# EAGLE board cyrf6936-bob (EAGLE 6.4)
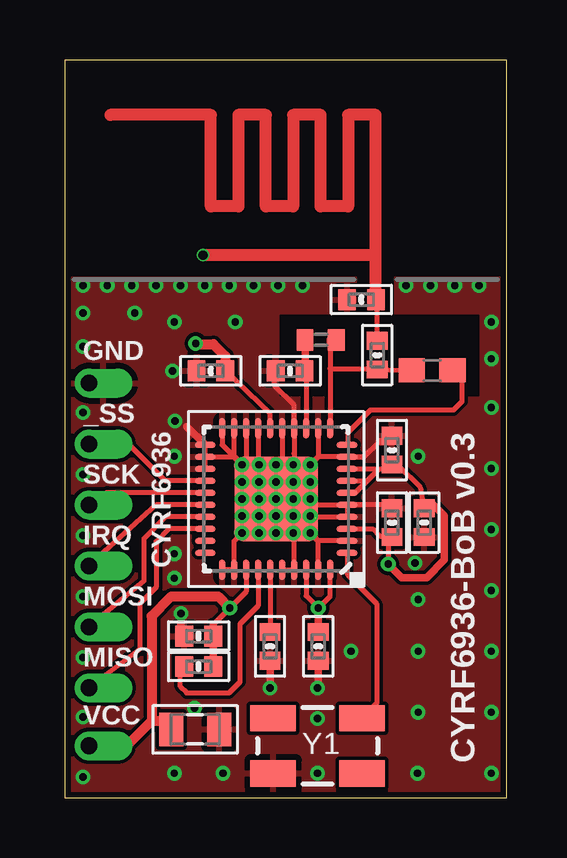
[diagram p0: board, top side]
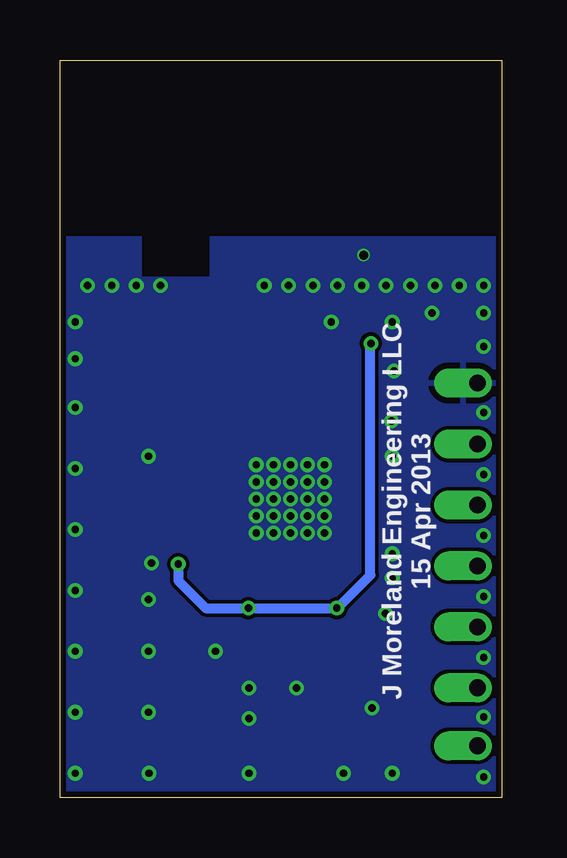
[diagram p1: board, bottom side, seen from below]

Size 18.41 x 30.73 mm. Coordinates in mm from the lower left corner, seen from the top.
Outline: 0,0 18.41,0 18.41,30.73 0,30.73 0,0
Copper layers (1*16): Top 0.035mm / dielectric 1.5mm / Bottom 0.035mm
Design rules "Fusion_eagle_rule_v1.1-JCM-restring *": minimum track width 6mil, minimum drill 12mil, track to track 6mil, track to pad 6mil, pad to pad 6mil, via to via 6mil, smd to smd 0mil, copper to edge 10mil, drill to drill 10mil, minimum pad ring 10mil, minimum via ring 2mil, stop-mask expansion 2mil, vias tented up to drill 100mil, thermal gap 10mil
Net classes: 0 default: width 0.203 mm, drill 0.305 mm
tRestrict: area 9,16.7 to 17.3,20.1; area 12.2,20.1 to 13.7,21.8
bRestrict: area 12.2,21.7 to 15,23.4

## Footprints (pad centres in the part's own frame; a part is rotated, then mirrored left to right if it is on the bottom)
1X1_50MIL = drill 0.7 pad 1.016 offset: P$1 0,0
0402-CAP = smd 0.74 x 0.87: 1 -0.6,0; 2 0.6,0
0805 = smd 1 x 1.4: 1 -1,0; 2 1,0
QFN50P600X600X90-41N = smd 0.25 x 0.86: 1 -2.25,-2.95; 2 -1.75,-2.95; 3 -1.25,-2.95; 4 -0.75,-2.95; 5 -0.25,-2.95; 6 0.25,-2.95; 7 0.75,-2.95; 8 1.25,-2.95; 9 1.75,-2.95; 10 2.25,-2.95; 21 2.25,2.95; 22 1.75,2.95; 23 1.25,2.95; 24 0.75,2.95; 25 0.25,2.95; 26 -0.25,2.95; 27 -0.75,2.95; 28 -1.25,2.95; 29 -1.75,2.95; 30 -2.25,2.95 | smd 0.86 x 0.25: 11 2.95,-2.25; 12 2.95,-1.75; 13 2.95,-1.25; 14 2.95,-0.75; 15 2.95,-0.25; 16 2.95,0.25; 17 2.95,0.75; 18 2.95,1.25; 19 2.95,1.75; 20 2.95,2.25; 31 -2.95,2.25; 32 -2.95,1.75; 33 -2.95,1.25; 34 -2.95,0.75; 35 -2.95,0.25; 36 -2.95,-0.25; 37 -2.95,-0.75; 38 -2.95,-1.25; 39 -2.95,-1.75; 40 -2.95,-2.25 | smd 3.5 x 3.5: 41 0,0
0603 = smd 1.1 x 1: 1 -0.85,0; 2 0.85,0
C0402 = smd 0.7 x 0.9: 1 -0.65,0; 2 0.65,0
CRYSTAL-SMD-5X3 = smd 1.9 x 1.1: 1 -1.85,-1.15; 2 1.85,-1.15; 3 1.85,1.15; 4 -1.85,1.15

## Placement (x,y rotation side)
_SS  SOLDER_PADTH  [1X1_50MIL]  1.02,14.73 0 top
C1  15pF  [0402-CAP]  13.03,18.44 90 top
C3  2.0pF  [0402-CAP]  9.4,17.78 180 top
C4  1.5pF  [0402-CAP]  12.37,20.75 180 top
C5  0.47uF  [0402-CAP]  8.56,6.3 270 top
C6  0.047uF  [0402-CAP]  6.1,17.78 180 top
C7  0.047uF  [0402-CAP]  13.64,11.46 90 top
C8  0.047uF  [0402-CAP]  5.59,6.73 180 top
C9  0.047uF  [0402-CAP]  10.57,6.3 270 top
C10  0.047uF  [0402-CAP]  14.99,11.46 270 top
C11  0.047uF  [0402-CAP]  13.64,14.48 90 top
C14  2.2uF  [0805]  5.44,2.84 0 top
C15  0.47uF  [0402-CAP]  5.59,5.46 180 top
CYRF6936  CYRF6936QFN  [QFN50P600X600X90-41N]  8.81,12.45 90 top
GND  SOLDER_PADTH  [1X1_50MIL]  1.02,17.27 0 top
IRQ  SOLDER_PADTH  [1X1_50MIL]  1.02,9.65 0 top
L1  [0603]  15.32,17.81 180 top
L2  [C0402]  10.67,19.08 0 top
MISO  SOLDER_PADTH  [1X1_50MIL]  1.02,4.57 0 top
MOSI  SOLDER_PADTH  [1X1_50MIL]  1.02,7.11 0 top
SCK  SOLDER_PADTH  [1X1_50MIL]  1.02,12.19 0 top
VCC  SOLDER_PADTH  [1X1_50MIL]  1.02,2.16 0 top
Y1  [CRYSTAL-SMD-5X3]  10.54,2.16 0 top

## Library data of the parts
_SS GND IRQ MISO MOSI SCK VCC = JCM-Connectors
C1 = JCM-Capacitors; PARTNO: C0402C150J5GACTU; VOLT: 50
C3 = JCM-Capacitors; PARTNO: C0402C209C5GACTU; VOLT: 50
C4 = JCM-Capacitors; PARTNO: C0402C159B5GACTU; VOLT: 50
C5 C15 = JCM-Capacitors; PARTNO: GRM155R60J474KE19D; VOLT: 6.3
C6-C11 = JCM-Capacitors; PARTNO: 0402YD473KAT2A
C14 = JCM-Capacitors; PARTNO: GRM21BR71A225KA01L
CYRF6936 = JCM-IC; PARTNO: CYRF6936B-40LTXC
L1 = SparkFun-Passives; PARTNO: ELJ-RE22NGFA
L2 = SparkFun-Passives; PARTNO: ELJ-RF1N8DFB
Y1 = SparkFun-FreqCtrl; PARTNO: 7B-12.000MEEQ-T

## Nets
_SS: _SS.P$1 CYRF6936.24
GND: C1.2 C3.2 C4.1 C4.2 C5.2 C6.2 C7.2 C8.2 C9.2 C10.2 C11.2 C14.2 CYRF6936.2 CYRF6936.4 CYRF6936.5 CYRF6936.9 CYRF6936.12 CYRF6936.14 CYRF6936.15 CYRF6936.17 CYRF6936.18 CYRF6936.19 CYRF6936.20 CYRF6936.21 CYRF6936.22 CYRF6936.23 CYRF6936.31 CYRF6936.32 CYRF6936.36 CYRF6936.37 CYRF6936.39 CYRF6936.41 GND.P$1 Y1.1
IRQ: CYRF6936.26 IRQ.P$1
MISO: CYRF6936.28 MISO.P$1
MOSI: CYRF6936.27 MOSI.P$1
N$2: CYRF6936.1 Y1.3
PACTL: CYRF6936.30
RFBIAS: CYRF6936.10 L1.1
RFN: C3.1 CYRF6936.13 L2.1
RFP: C1.1 CYRF6936.11 L1.2 L2.2
RST: C15.2 CYRF6936.34
SCK: CYRF6936.25 SCK.P$1
TV1: CYRF6936.29
VCC: C6.1 C7.1 C8.1 C9.1 C10.1 C11.1 C14.1 C15.1 CYRF6936.3 CYRF6936.6 CYRF6936.7 CYRF6936.8 CYRF6936.16 CYRF6936.33 CYRF6936.38 CYRF6936.40 VCC.P$1
VDD: C5.1 CYRF6936.35

## Tracks (layer width: path | path; a pad name or v marks a point on that pad's centre or on a via)
_SS
  Top 0.203: CYRF6936.24 4.2,13.2 2.67,14.73 _SS.P$1
GND  (via drill 0.3 pad 0.61, 0.38 pad 0.51)  (1 unrouted)
  Top 0.203: 11.79,12.19 10.52,12.19 | 13.64,12.2 CYRF6936.5 11.79,12.2 11.79,11.68 | CYRF6936.2 10.57,10.7 | CYRF6936.18 7.56,13.97 v7.39,13.87 7.06,14.2 | CYRF6936.20 6.56,14.7 7.06,14.2 | CYRF6936.22 CYRF6936.21 | 8.74,17.77 8.74,17.17 9.56,16.34 CYRF6936.14 9.56,14.34 v9.52,13.87 | 13.11,14.83 12.47,14.2 CYRF6936.9 10.57,14.2 v10.24,13.87 10.56,14.2 CYRF6936.12 | CYRF6936.36 CYRF6936.37 9.56,10.55 v9.52,11.02 | 13.02,19.09 13.02,20.7 C4.1 12.95,20.77 12.95,21.21 | 5.84,14.2 7.06,14.2 | 7.06,14.2 CYRF6936.19 | CYRF6936.15 9.06,13.97 v8.81,13.87 | CYRF6936.4 10.24,11.68 v10.24,11.73 | 10.57,9.47 10.57,10.69 v10.24,11.02 | CYRF6936.31 CYRF6936.32 7.06,10.7 v7.39,11.02 | CYRF6936.23 5.86,14.17 5.84,14.17 | CYRF6936.17 8.06,13.97 v8.1,13.87
  Top 0.254: 11.8,12.21 CYRF6936.5 11.79,12.19 | 10.44,11.66 10.44,12.45 CYRF6936.41 | C7.2 13.64,12.2 | 10.57,10.7 v10.24,11.02 | CYRF6936.39 10.57,9.47 | 7.06,14.2 v7.39,13.87 | 10.57,4.57 v10.54,4.57 | 8.56,4.72 v8.56,4.57 | 10.44,10.85 10.44,11.63
  Top 0.305: CYRF6936.21 5.09,15.44 | C9.2 10.57,4.57 | C5.2 8.56,4.72 | v4.85,7.67 4.84,6.96 C8.2 | 8.74,17.77 C3.2 | C1.2 13.02,19.09 | 13.11,14.83 13.63,14.83 C11.2
  Top 0.508: 12.95,21.21 12.95,22.61 | 12.95,22.61 12.95,28.45 11.81,28.45 11.81,24.64 10.67,24.64 10.67,28.45 9.52,28.45 9.52,24.64 8.38,24.64 8.38,28.45 7.24,28.45 7.24,24.64 6.1,24.64 6.1,28.45 1.9,28.45 | 12.95,22.61 v5.77,22.61
  other vias: 4.57,9.14 14.61,9.78 10.24,13.16 9.52,13.16 8.81,13.16 8.1,13.16 7.39,13.16 10.24,12.45 9.52,12.45 8.81,12.45 8.1,12.45 7.39,12.45 9.52,11.73 8.81,11.73 8.1,11.73 7.39,11.73 8.81,11.02 8.1,11.02 4.5,17.78 4.6,15.7 0.76,3.35 0.76,5.84 0.76,8.38 0.76,10.92 0.76,13.46 0.76,16.05 0.76,21.34 0.76,0.86 15.24,21.34 14.22,21.34 8.89,21.34 7.87,21.34 2.79,21.34 6.86,21.34 5.84,21.34 4.83,21.34 3.81,21.34 17.27,21.34 14.71,1.02 16.26,21.34 4.57,1.02 6.6,1.02 10.54,1.02 10.54,3.3 5.41,3.73 4.57,10.16 4.57,14.22 4.57,19.81 14.73,8.26 11.94,6.1 14.73,3.56 7.11,19.81 0.76,18.8 0.76,20.19 14.73,14.22 17.78,3.56 17.78,6.1 17.78,8.64 17.78,11.18 17.78,13.72 17.78,16.26 17.78,1.02 17.78,18.29 17.78,19.81 14.73,6.1 1.78,21.34 2.92,20.19 9.91,21.34
  pour Bottom: 0,0 18.41,0 18.41,23.32 0,23.32
  pour Top (rank 2): 0,0 18.41,0 18.41,21.59 0,21.59
IRQ
  Top 0.203: CYRF6936.26 3.81,12.2 IRQ.P$1
MISO
  Top 0.203: CYRF6936.28 4.34,11.2 3.81,10.67 3.81,8.76 3.12,8.08 3.12,6.17 MISO.P$1
MOSI
  Top 0.203: CYRF6936.27 4.2,11.7 3.3,10.8 3.3,9.02 MOSI.P$1
N$2
  Top 0.203: Y1.3 13,3.92 13,8.08 11.79,9.29 11.79,10.17 CYRF6936.1
RFBIAS
  Top 0.203: 16.56,17.79 16.56,16.51 16.2,16.15 12.75,16.15 11.79,15.19 11.79,14.72 CYRF6936.10
  Top 0.305: 16.56,17.79 L1.1
RFN
  Top 0.203: 10.06,19.07 CYRF6936.13
  Top 0.305: C3.1 10.02,17.78 L2.1
  Top 0.508: 10.06,19.07 L2.1
RFP
  Top 0.203: 11.06,18.92 11.06,17.88 | 11.06,17.88 CYRF6936.11 | 14.45,17.79 C1.1 11.11,17.84 11.06,17.88
  Top 0.305: 11.06,19.07 11.06,18.92 11.22,19.07 L2.2 | 13.03,17.8 C1.1 | 14.45,17.79 L1.2
RST
  Top 0.203: CYRF6936.34 8.06,7.99 7.31,7.24 7.31,4.83 6.86,4.37 5.08,4.37 4.83,4.62 4.83,5.55
  Top 0.305: 4.83,5.55 C15.2
SCK
  Top 0.203: CYRF6936.25 1.77,12.7
  Top 0.254: 1.77,12.7 SCK.P$1
VCC  (via drill 0.3 pad 0.61)
  Top 0.203: CYRF6936.40 11.06,8.4 v10.57,7.9 10.06,8.4 CYRF6936.38 | CYRF6936.3 12.83,11.2 13.13,10.9 13.49,10.9 v13.49,9.73 | C10.1 14.83,12.9 13.91,13.83 | CYRF6936.33 7.56,8.58 v6.88,7.9 6.19,7.21 | CYRF6936.16 8.56,15.99 C6.1 | CYRF6936.8 13.11,13.7 | 13.11,13.7 13.46,13.7 C11.1 | CYRF6936.6 12.11,12.7 12.61,13.2 | CYRF6936.7 12.61,13.2 | 12.61,13.2 13.11,13.7
  Top 0.254: 13.47,13.7 C11.1 | C7.1 13.63,10.9 13.49,10.9 | 15.35,12.21 C10.1 | 13.51,13.7 C11.1 | 13.91,13.83 C11.1
  Top 0.305: C9.1 v10.57,7.9 | v13.49,9.73 14.05,9.17 15.09,9.17 15.82,9.91 15.82,11.73 15.35,12.21 | VCC.P$1 2.58,2.16 | C15.1 C8.1 6.19,7.21
  Top 0.406: v6.88,7.9 6.4,8.38 4.45,8.38 3.62,7.56 3.62,3.2 | 3.62,3.2 2.58,2.16 | 3.62,3.2 4.23,3.2 C14.1 | v5.46,18.92 5.49,18.9 6.2,18.9 6.7,18.4 C6.1
  Bottom 0.406: v13.49,9.73 13.49,9.04 12.34,7.9 v10.57,7.9 v6.88,7.9 6.86,7.9 5.49,9.27 5.49,18.9 v5.46,18.92
VDD
  Top 0.203: CYRF6936.35 8.56,6.95
  Top 0.254: 8.56,6.95 C5.1

## Text on the board
tNames: CYRF6936-BoB v0.3
bNames: J Moreland Engineering LLC / 15 Apr 2013